# EAGLE board relay (EAGLE 9.6.2)
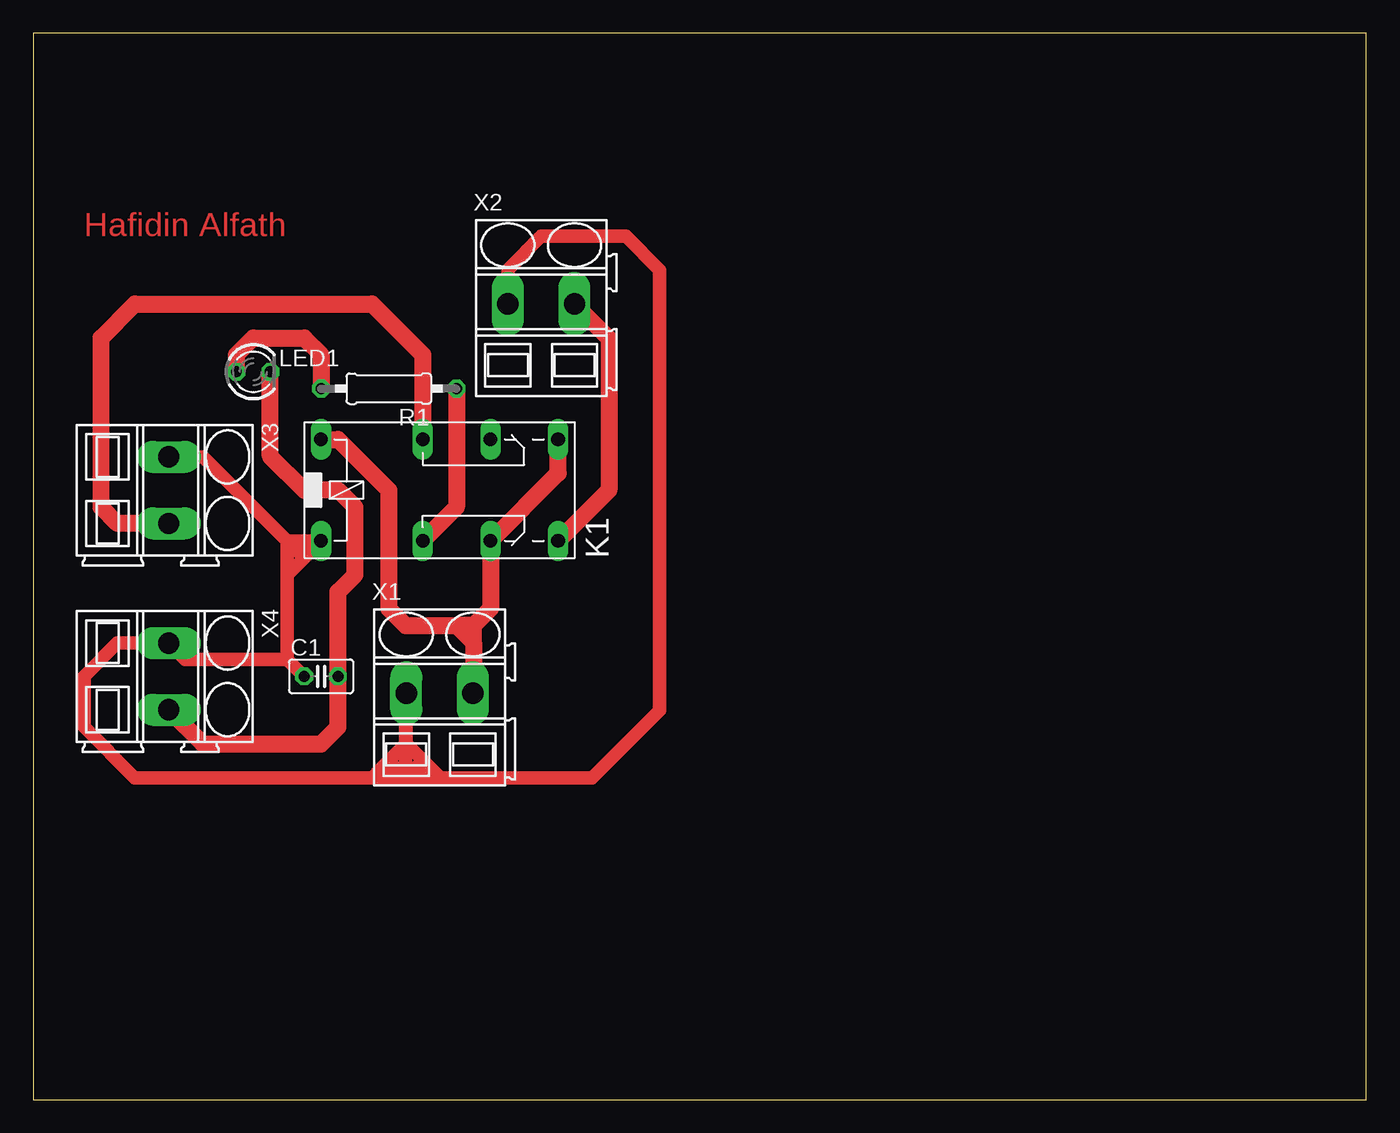
[diagram p0: board, top side]

Size 100 x 80 mm. Coordinates in mm from the lower left corner, seen from the top.
Outline: 0,0 100,0 100,80 0,80 0,0
Copper layers (1*16): Top 0.035mm / dielectric 1.5mm / Bottom 0.035mm
Design rules "default": minimum track width 6mil, minimum drill 0.35mm, track to track 6mil, track to pad 6mil, pad to pad 6mil, via to via 6mil, smd to smd 6mil, copper to edge 40mil, drill to drill 6mil, minimum pad ring 10mil, minimum via ring 8mil, stop-mask expansion 4mil, vias tented up to drill 0mil, thermal gap 10mil

## Footprints (pad centres in the part's own frame; a part is rotated, then mirrored left to right if it is on the bottom)
C025-025X050 = drill 0.813 octagon: 1 -1.27,0; 2 1.27,0
351 = drill 1.016 long: 1 -3.81,-3.81; 16 -3.81,3.81; O1 8.89,-3.81; O2 8.89,3.81; P1 3.81,-3.81; P2 3.81,3.81; S1 13.97,-3.81; S2 13.97,3.81
LED3MM = drill 0.813 octagon: A -1.27,0; K 1.27,0
0207/10 = drill 0.813 octagon: 1 -5.08,0; 2 5.08,0
SMKDSP_1,5/2 = drill 1.6 pad 1.8 long: 1 -2.5,0; 2 2.5,0

## Placement (x,y rotation side)
C1  [C025-025X050]  21.59,31.75 0 top
K1  351  [351]  25.4,45.72 0 top
LED1  [LED3MM]  16.51,54.61 0 top
R1  [0207/10]  26.67,53.34 180 top
X1  SMKDSP_1,5/2  [SMKDSP_1,5/2]  30.48,30.48 0 top
X2  SMKDSP_1,5/2  [SMKDSP_1,5/2]  38.1,59.69 0 top
X3  SMKDSP_1,5/2  [SMKDSP_1,5/2]  10.16,45.72 270 top
X4  SMKDSP_1,5/2  [SMKDSP_1,5/2]  10.16,31.75 270 top

## Library data of the parts
C1 = rcl; SPICEPREFIX: C
K1 = relay; OC_FARNELL: unknown; OC_NEWARK: unknown
LED1 = led
R1 = rcl; SPICEPREFIX: R
X1-X4 = con-phoenix-smkdsp; MF: FARNELL; MPN: 1733570; OC_FARNELL: 3041244; OC_NEWARK: 69C8588

## Nets
GND: C1.1 K1.1 X1.1 X2.1 X3.1 X4.1
N$1: K1.P1 R1.1
N$2: LED1.A R1.2
O1: K1.S1 X2.2
P2: K1.P2 X3.2
S12: K1.16 K1.O1 K1.S2 X1.2
VOUT: C1.2 LED1.K X4.2

## Tracks (layer width: path | path; a pad name or v marks a point on that pad's centre or on a via)
GND
  Top 1.016: 19.05,33.02 11.39,33.02 X4.1 6.31,34.25 3.81,31.75 3.81,27.94 7.62,24.13 25.4,24.13 | C1.1 19.05,33.02 | 19.05,39.37 20.32,40.64 | 20.32,40.64 K1.1 19.05,41.91 | 19.05,33.02 19.05,39.37 | 20.32,40.64 19.05,41.91 | 19.05,41.91 12.74,48.22 X3.1 | 19.05,41.91 19.05,39.37 | 27.98,26.71 X1.1 27.94,30.44 27.94,24.13 | 25.4,24.13 26.04,24.77 | 26.04,24.77 26.67,25.4 | 26.67,25.4 27.98,26.71 | X2.1 35.6,62.27 38.1,64.77 44.45,64.77 46.99,62.23 46.99,29.21 41.91,24.13 30.48,24.13 | 30.48,24.13 29.21,24.13 | 29.21,24.13 27.94,24.13 | 27.98,26.71 29.25,25.44 | 29.25,25.44 30.48,24.21 30.48,24.13 | 25.4,24.13 27.94,24.13 | 26.67,25.4 27.3,24.77 | 27.94,24.13 27.3,24.77 | 27.94,24.13 29.25,25.44 | 27.3,24.77 28.57,24.77 29.21,24.13 | 27.3,24.77 26.04,24.77
  cutout Top (rank 3, no thermals): 1.27,24.13 1.27,20.32 49.53,20.32 49.53,68.58 1.27,68.58
N$1
  Top 1.27: K1.P1 31.75,44.45 R1.1
N$2
  Top 1.27: LED1.A 15.24,55.88 16.51,57.15 20.32,57.15 21.59,55.88 R1.2
O1
  Top 1.27: 40.64,59.69 X2.2 43.18,57.11 43.18,45.72 K1.S1
P2
  Top 1.27: X3.2 6.31,43.22 5.08,44.45 5.08,57.15 7.62,59.69 25.4,59.69 29.21,55.88 K1.P2
S12
  Top 1.27: K1.16 22.86,49.53 26.67,45.72 26.67,36.83 27.94,35.56 31.75,35.56 | 31.75,35.56 33.02,34.29 | 33.02,34.29 33.02,30.52 X1.2 | 33.02,35.56 34.29,36.83 K1.O1 39.37,46.99 K1.S2 | 33.02,35.56 31.75,35.56 | 33.02,34.29 33.02,35.56
VOUT
  Top 1.27: X4.2 12.74,26.67 21.59,26.67 22.86,27.94 C1.2 22.86,38.1 24.13,39.37 24.13,44.45 22.86,45.72 20.32,45.72 17.78,48.26 LED1.K

## Text on the board
Top: Hafidin Alfath